# Altium PCB IMU_REV_D.PcbDoc
Units mm, origin at the board's own origin, x right, y up, seen from the top; angles counter-clockwise.
Board outline 78.62 x 35 mm, 4 copper layers (Top Layer, Mid-Layer 1, Mid-Layer 2, Bottom Layer), stack 1.08 mm thick; 25 components, 16 nets, 124 pads, 179 vias.
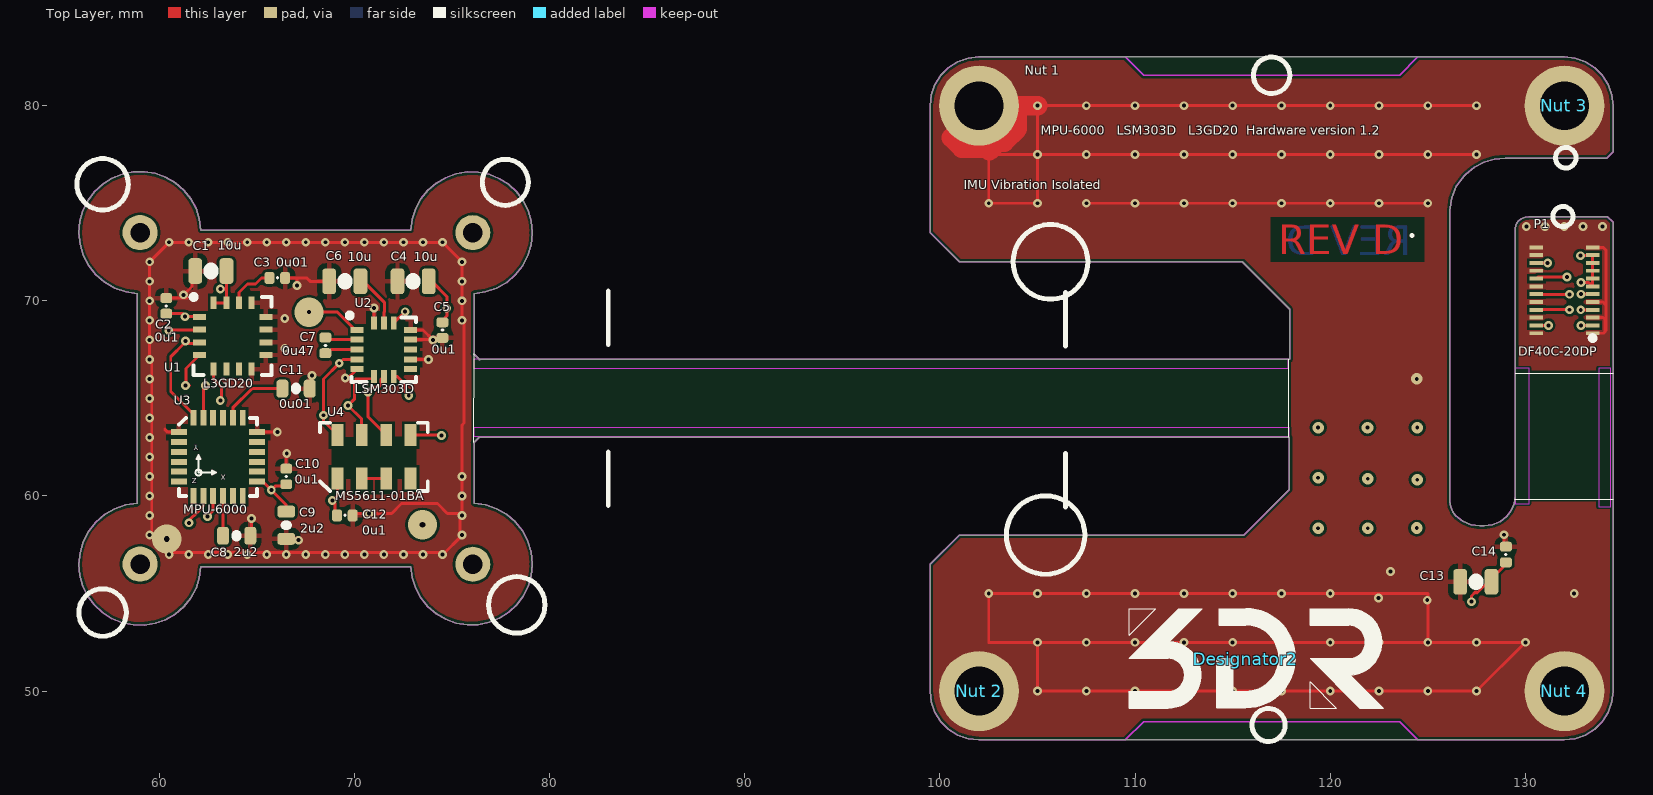
[diagram p0: Top Layer view]
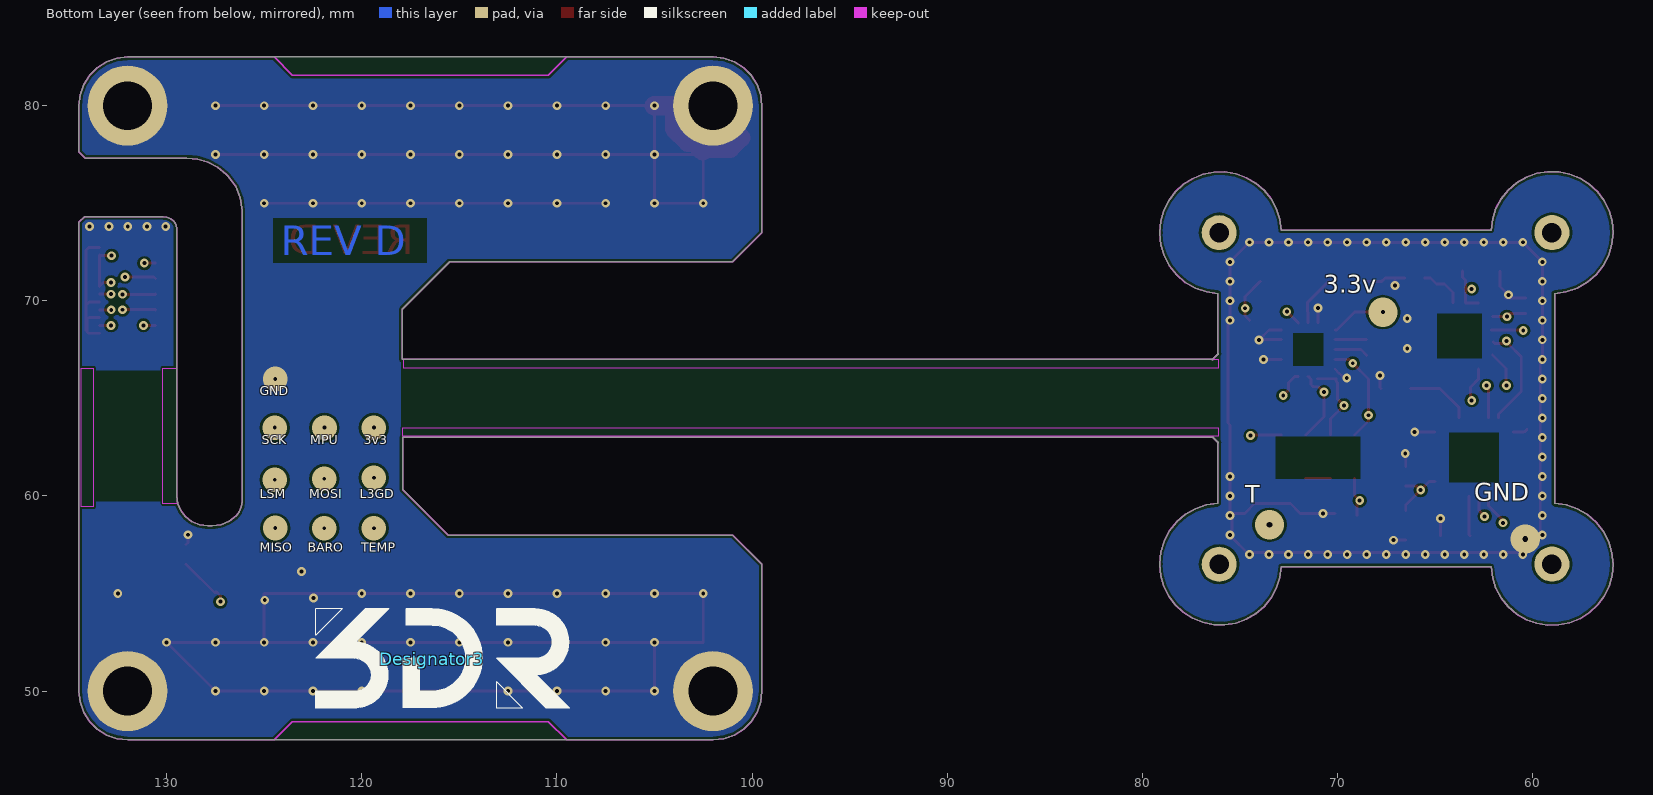
[diagram p1: Bottom Layer view, seen from below]
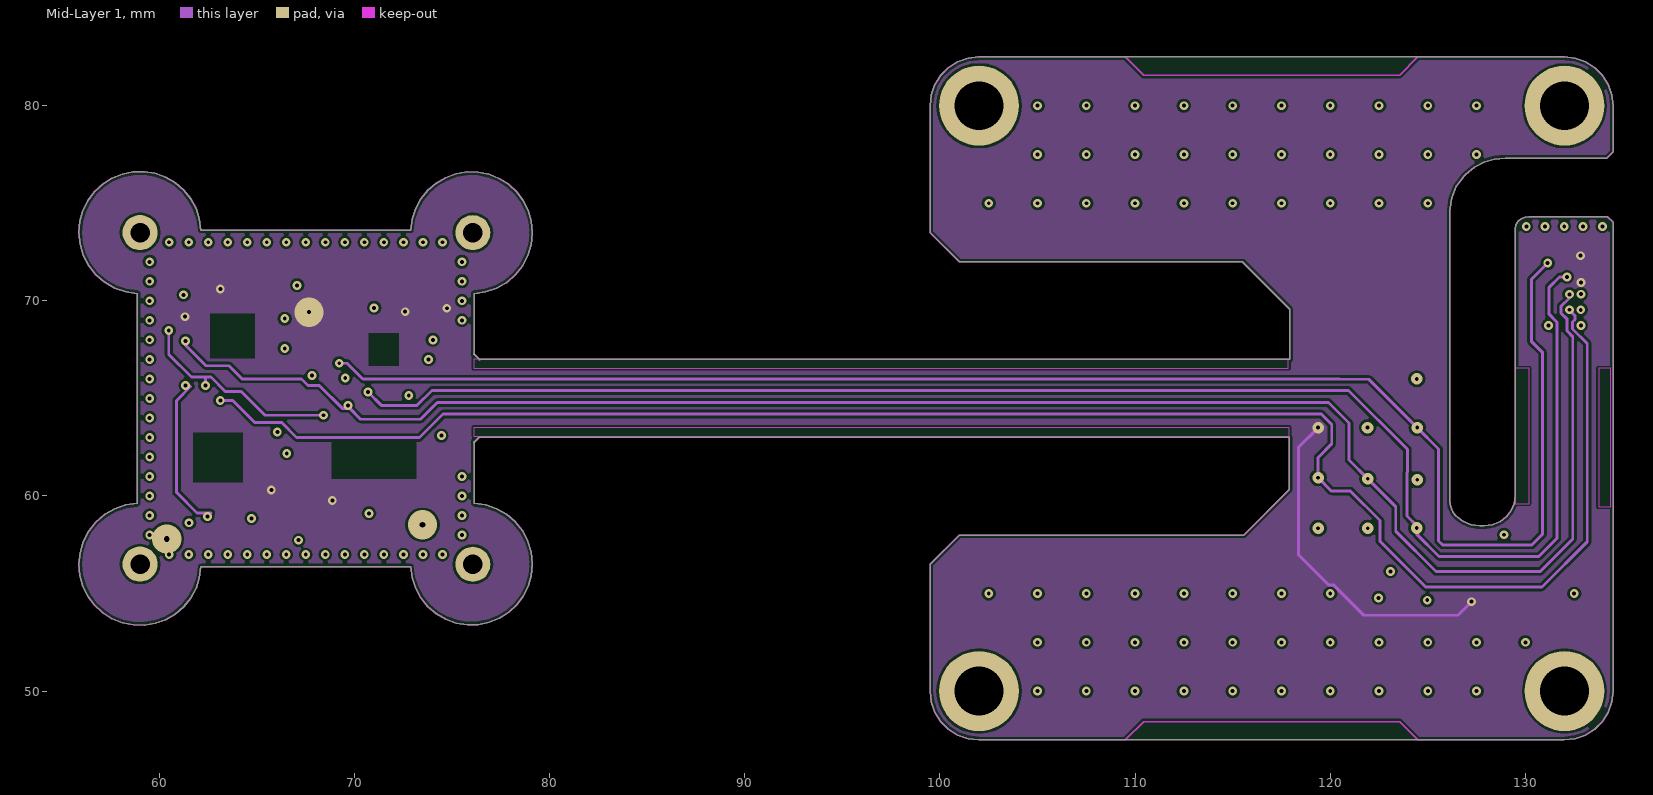
[diagram p2: Mid-Layer 1]
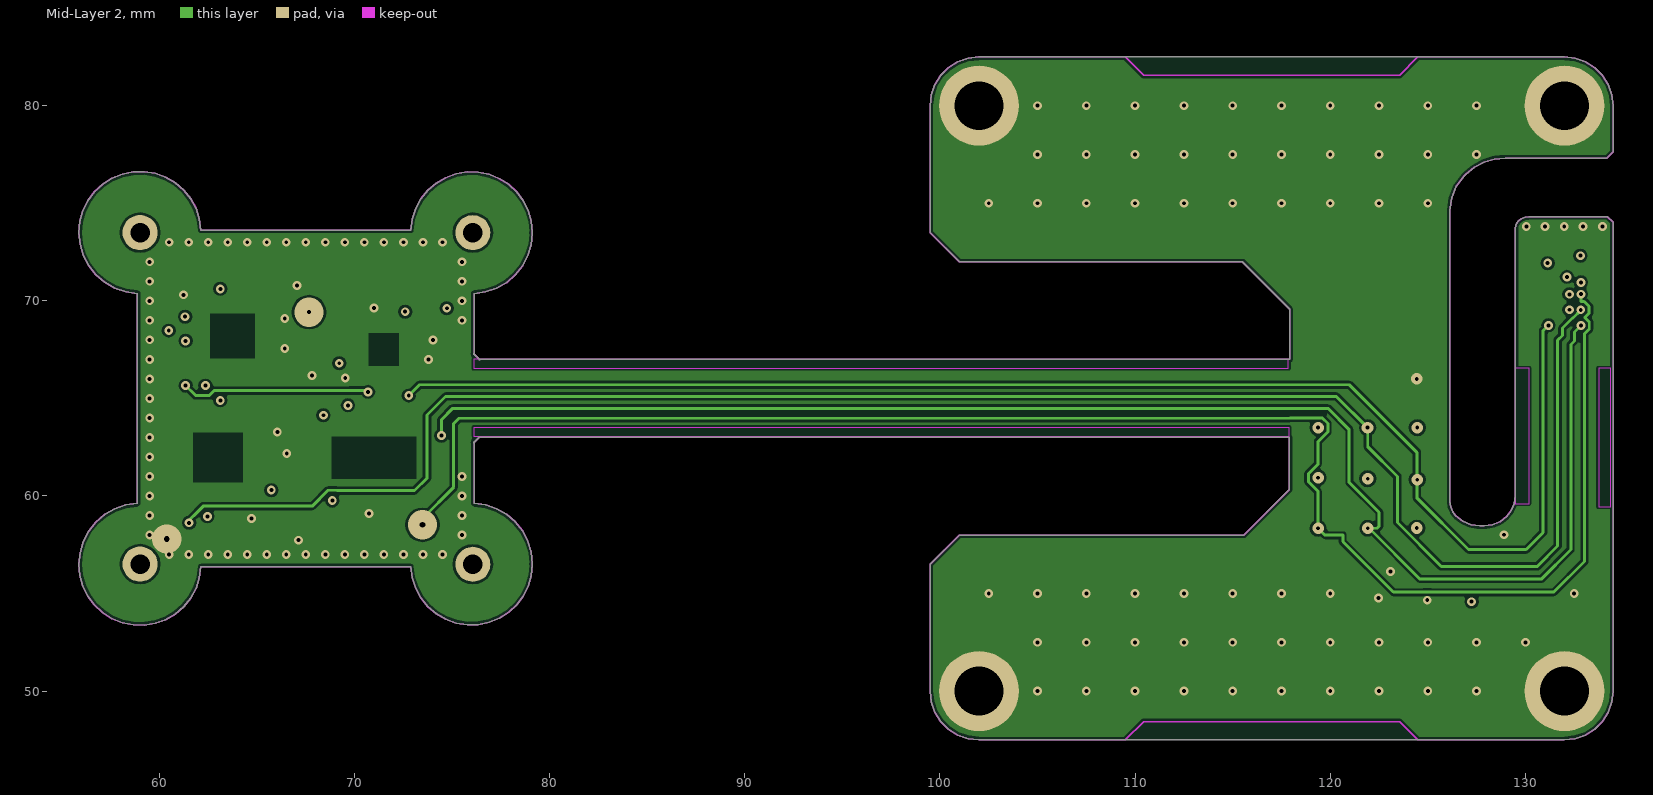
[diagram p3: Mid-Layer 2]
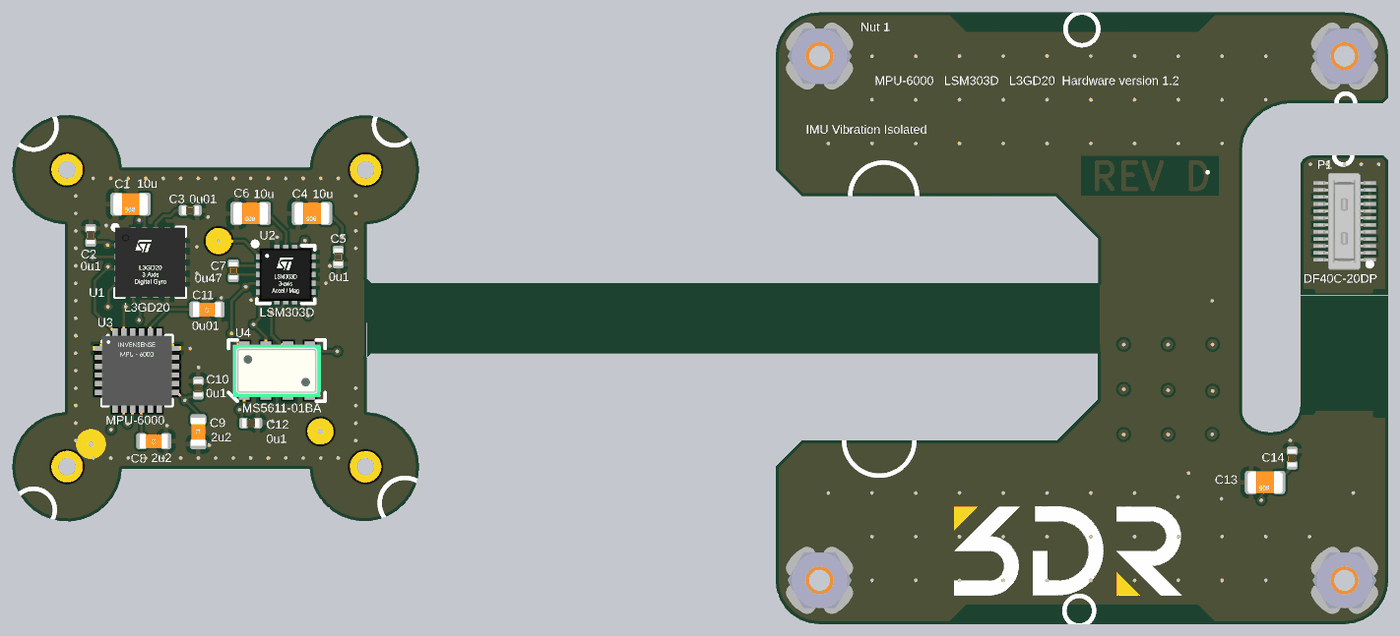
[diagram p4: 3D render of the assembled board from above, using the file's embedded part models]

## Layer stack, top to bottom
Top Solder: solder mask 0.01, BLACK Matte Finish, Dk 3.5
Top Layer: signal copper 0.0354
Dielectric 1: prepreg 0.4741, FR-4, Dk 4.2
Mid-Layer 1: signal copper 0.0177
Dielectric 2: core 0.0254, Polyamide, Dk 3
Mid-Layer 2: signal copper 0.0177
Dielectric 3: prepreg 0.4741, FR-4, Dk 4.2
Bottom Layer: signal copper 0.0354
Bottom Solder: solder mask 0.01, BLACK Matte Finish, Dk 3.5

## Board outline
58.874,59.624 58.282,59.543 57.717,59.351 57.198,59.054 56.745,58.665 56.375,58.197 56.1,57.666 55.931,57.094 55.874,56.499 55.926,55.932 56.08,55.383 56.331,54.872 56.67,54.415 57.087,54.026 57.567,53.72 58.095,53.506 58.653,53.391 59.223,53.38 59.785,53.472 60.321,53.664 60.813,53.95 61.246,54.321 61.604,54.765 61.875,55.265 62.051,55.807 62.126,56.372 72.877,56.372 72.953,55.81 73.129,55.271 73.4,54.773 73.756,54.333 74.186,53.964 74.676,53.678 75.209,53.487 75.768,53.394 76.335,53.405 76.891,53.518 77.416,53.729 77.895,54.032 78.312,54.417 78.651,54.871 78.904,55.378 79.06,55.923 79.115,56.487 79.111,56.488 79.107,56.489 79.103,56.491 79.1,56.494 79.098,56.498 79.096,56.502 79.096,56.506 79.096,56.51 79.098,56.514 79.1,56.518 79.103,56.521 79.107,56.523 79.111,56.525 79.115,56.525 79.055,57.116 78.884,57.684 78.609,58.21 78.239,58.674 77.788,59.06 77.272,59.353 76.71,59.543 76.122,59.624 76.122,62.723 76.118,62.724 76.114,62.725 76.11,62.727 76.107,62.73 76.105,62.734 76.103,62.738 76.103,62.742 76.103,62.746 76.104,62.75 76.107,62.754 76.109,62.757 76.113,62.759 76.116,62.76 76.12,62.761 76.124,62.761 76.128,62.76 76.132,62.758 76.135,62.756 76.365,62.986 76.362,62.99 76.36,62.994 76.36,62.999 76.36,63.003 76.361,63.007 76.363,63.01 76.366,63.013 76.369,63.016 76.373,63.017 76.377,63.018 76.381,63.018 76.385,63.017 76.388,63.016 76.392,63.013 76.394,63.01 76.396,63.007 76.397,63.003 76.398,62.999 117.9,62.999 117.9,60.324 115.575,57.999 100.993,57.999 99.493,56.499 99.493,49.999 99.556,49.443 99.741,48.914 100.038,48.44 100.434,48.045 100.908,47.747 101.437,47.562 101.993,47.499 131.993,47.499 132.549,47.562 133.078,47.747 133.552,48.045 133.948,48.44 134.245,48.914 134.43,49.443 134.493,49.999 134.493,74.033 134.207,74.32 130.186,74.32 129.984,74.293 129.796,74.215 129.635,74.091 129.552,73.983 129.5,73.858 129.482,73.723 129.482,59.995 129.432,59.613 129.285,59.258 129.05,58.953 128.709,58.691 128.312,58.526 127.885,58.47 127.661,58.47 127.212,58.529 126.793,58.702 126.434,58.978 126.269,59.194 126.165,59.445 126.129,59.714 126.129,74.624 126.215,75.275 126.466,75.881 126.866,76.402 126.942,76.479 127.376,76.834 127.871,77.099 128.407,77.262 128.966,77.317 134.181,77.317 134.493,77.629 134.493,79.999 134.43,80.556 134.245,81.084 133.948,81.558 133.552,81.954 133.078,82.252 132.549,82.437 131.993,82.499 101.993,82.499 101.437,82.437 100.908,82.252 100.434,81.954 100.038,81.558 99.741,81.084 99.556,80.556 99.493,79.999 99.493,73.499 100.993,71.999 115.493,71.999 117.925,69.567 117.925,66.999 76.42,66.999 76.42,66.995 76.419,66.991 76.417,66.988 76.414,66.985 76.411,66.983 76.407,66.981 76.403,66.98 76.399,66.98 76.395,66.981 76.392,66.983 76.389,66.985 76.386,66.988 76.384,66.991 76.383,66.995 76.382,66.999 76.383,67.004 76.385,67.009 76.388,67.013 76.135,67.266 76.132,67.263 76.128,67.261 76.124,67.26 76.12,67.26 76.116,67.261 76.112,67.263 76.109,67.265 76.106,67.268 76.104,67.271 76.103,67.275 76.102,67.279 76.103,67.284 76.104,67.288 76.106,67.291 76.109,67.294 76.113,67.296 76.117,67.298 76.121,67.298 76.121,70.374 76.709,70.455 77.271,70.645 77.787,70.939 78.238,71.324 78.608,71.788 78.883,72.314 79.054,72.882 79.114,73.473 79.109,73.473 79.105,73.475 79.102,73.477 79.099,73.48 79.097,73.483 79.095,73.487 79.095,73.492 79.095,73.496 79.097,73.5 79.099,73.504 79.102,73.507 79.105,73.509 79.109,73.51 79.114,73.511 79.059,74.075 78.903,74.62 78.651,75.127 78.311,75.581 77.895,75.966 77.416,76.269 76.89,76.48 76.335,76.593 75.768,76.603 75.209,76.511 74.676,76.319 74.186,76.034 73.756,75.665 73.4,75.225 73.129,74.727 72.953,74.188 72.877,73.627 62.126,73.627 62.051,74.191 61.875,74.733 61.604,75.234 61.246,75.677 60.813,76.048 60.321,76.334 59.785,76.527 59.223,76.619 58.653,76.607 58.095,76.492 57.567,76.278 57.087,75.972 56.67,75.584 56.331,75.126 56.08,74.615 55.926,74.066 55.874,73.499 55.931,72.905 56.1,72.332 56.375,71.802 56.745,71.333 57.198,70.944 57.717,70.648 58.282,70.456 58.874,70.374
board region plug_flex: 129.462,59.842 129.482,59.995 129.482,66.294 134.493,66.294 134.493,59.842
board region BASE_MOUNT: 134.493,59.842 134.493,49.999 134.43,49.443 134.245,48.914 133.948,48.44 133.552,48.045 133.078,47.747 132.549,47.562 131.993,47.499 101.993,47.499 101.437,47.562 100.908,47.747 100.434,48.045 100.038,48.44 99.741,48.914 99.556,49.443 99.493,49.999 99.493,56.499 100.993,57.999 115.575,57.999 117.9,60.324 117.9,62.999 117.874,62.999 117.861,66.999 117.925,66.999 117.925,69.567 115.493,71.999 100.993,71.999 99.493,73.499 99.493,79.999 99.556,80.556 99.741,81.084 100.038,81.558 100.434,81.954 100.908,82.252 101.437,82.437 101.993,82.499 131.993,82.499 132.549,82.437 133.078,82.252 133.552,81.954 133.948,81.558 134.245,81.084 134.43,80.556 134.493,79.999 134.493,77.629 134.181,77.317 128.966,77.317 128.407,77.262 127.871,77.099 127.376,76.834 126.942,76.479 126.866,76.402 126.466,75.881 126.215,75.275 126.129,74.624 126.129,59.714 126.165,59.445 126.269,59.194 126.434,58.978 126.793,58.702 127.212,58.529 127.661,58.47 127.885,58.47 128.312,58.526 128.709,58.691 129.05,58.953 129.285,59.258 129.432,59.613 129.462,59.842
board region FLEX: 117.874,62.999 76.398,62.999 76.392,63.013 76.377,63.018 76.363,63.01 76.36,62.994 76.135,62.756 76.12,62.761 76.111,62.756 76.116,67.261 76.132,67.263 76.388,67.013 76.382,66.999 76.389,66.985 76.403,66.98 76.417,66.988 117.861,66.999
board region IMU: 76.111,62.756 76.107,62.754 76.103,62.738 76.114,62.725 76.122,59.624 76.71,59.543 77.272,59.353 77.788,59.06 78.239,58.674 78.609,58.21 78.884,57.684 79.055,57.116 79.115,56.525 79.1,56.518 79.096,56.502 79.107,56.489 79.06,55.923 78.904,55.378 78.652,54.87 78.312,54.417 77.895,54.032 77.417,53.729 76.891,53.518 76.335,53.405 75.768,53.394 75.209,53.487 74.676,53.678 74.186,53.964 73.756,54.333 73.4,54.773 73.129,55.271 72.953,55.81 72.877,56.372 62.126,56.372 62.051,55.807 61.875,55.265 61.604,54.765 61.246,54.321 60.813,53.95 60.321,53.664 59.785,53.472 59.223,53.38 58.653,53.391 58.095,53.506 57.567,53.72 57.087,54.026 56.67,54.415 56.331,54.872 56.08,55.383 55.926,55.932 55.874,56.499 55.931,57.094 56.1,57.666 56.375,58.197 56.745,58.665 57.198,59.054 57.717,59.351 58.282,59.543 58.874,59.624 58.874,70.374 58.282,70.456 57.717,70.648 57.198,70.944 56.745,71.333 56.375,71.802 56.1,72.332 55.931,72.905 55.874,73.499 55.926,74.066 56.08,74.615 56.331,75.126 56.67,75.584 57.087,75.972 57.567,76.278 58.095,76.492 58.653,76.607 59.223,76.619 59.785,76.527 60.321,76.334 60.813,76.048 61.246,75.677 61.604,75.234 61.875,74.733 62.051,74.191 62.126,73.627 72.877,73.627 72.953,74.188 73.129,74.727 73.4,75.225 73.756,75.665 74.186,76.034 74.676,76.319 75.209,76.511 75.768,76.603 76.335,76.593 76.89,76.48 77.416,76.269 77.895,75.966 78.311,75.581 78.651,75.127 78.903,74.62 79.059,74.075 79.114,73.511 79.099,73.504 79.095,73.487 79.105,73.475 79.054,72.882 78.883,72.314 78.608,71.788 78.238,71.324 77.787,70.939 77.271,70.645 76.709,70.455 76.121,70.374 76.121,67.298 76.106,67.291 76.103,67.275 76.116,67.261
board region PLUG_MOUNT: 129.482,66.294 129.482,73.723 129.5,73.858 129.552,73.983 129.635,74.091 129.796,74.215 129.984,74.293 130.186,74.32 134.207,74.32 134.493,74.033 134.493,66.294

## Design rules (kind name [scope] priority, off if disabled: settings)
Clearance [All] p1: gap=0.127
ComponentClearance ComponentClearance_1 [HasFootprint('3DR-WORDMARK-LARGE')] p1: gap=0 collisioncheckmode=3 verticalgap=0 showdistances=FALSE
ComponentClearance ComponentClearance_2 [(HasFootprint('BASE FOAM')) vs HasFootprint('DF13A-10P-1.25H')] p2: gap=0 collisioncheckmode=3 verticalgap=0 showdistances=FALSE
ComponentClearance ComponentClearance_3 [HasFootprint('PEM-SMTSO-M1.6-2-ET')] p3: gap=0 collisioncheckmode=3 verticalgap=0 showdistances=FALSE
ComponentClearance ComponentClearance_4 [(HasFootprint('DF40C-10-DP') OR HasFootprint('DF13A-10P-1.25H'))] p4: gap=0 collisioncheckmode=3 verticalgap=0 showdistances=FALSE
ComponentClearance ComponentClearance_5 [(HasFootprint('0402-CAP') OR HasFootprint('0603-CAP') OR HasFootprint('0805-CAP') OR HasFootprint('MS5611-01BA'))] p5: gap=0 collisioncheckmode=3 verticalgap=0 showdistances=FALSE
ComponentClearance [All] p6: gap=0.125 collisioncheckmode=3 verticalgap=0.254 showdistances=FALSE
MinimumSolderMaskSliver [All] p1 off: minsoldermaskwidth=0.254
NetAntennae exceptions [IsVia] p1: netantennaetolerance=100
NetAntennae [All] p2: netantennaetolerance=0
PlaneConnect NutConnect [HasFootprint('PEM-SMTSO-M1.6-2-ET')] p1: planeconnectstyle=Direct reliefexpansion=0.508 reliefentries=4 reliefconductorwidth=0.254 reliefairgap=0.254
PlaneConnect [All] p2: planeconnectstyle=Relief reliefexpansion=0.508 reliefentries=4 reliefconductorwidth=0.254 reliefairgap=0.254
PolygonConnect [IsVia] p1: connectstyle=Direct reliefconductorwidth=0.254 reliefentries=4 polygonreliefangle="90 Angle" airgapwidth=0.254
PolygonConnect PolygonConnect_2 [HasFootprint('PEM-SMTSO-M1.6-2-ET')] p2: connectstyle=Direct reliefconductorwidth=0.254 reliefentries=4 polygonreliefangle="90 Angle" airgapwidth=0.254
PolygonConnect "P1_direct GND" [(InComponent('P1') AND InNet('GND'))] p3: connectstyle=Direct reliefconductorwidth=0.254 reliefentries=4 polygonreliefangle="90 Angle" airgapwidth=0.254
PolygonConnect PolygonConnect_1 [All] p4: connectstyle=Relief reliefconductorwidth=0.254 reliefentries=4 polygonreliefangle="90 Angle" airgapwidth=0.254
RoutingVias [All] p1: holewidth=0.2 width=0.45 viastyle="Through Hole" minholewidth=0.2 minwidth=0.45 maxholewidth=0.711 maxwidth=1.27
SilkToBoardRegionClearance [All] p1 off:
SilkToSilkClearance [All] p1 off: silktosilkclearance=0.254
SilkToSolderMaskClearance [IsPad] p1 off: minsilkscreentomaskgap=0.254 clearancetoexposedcopper=TRUE
SolderMaskExpansion [All] p1: expansion=0.102
Width [All] p1: maxlimit=3 minlimit=0.12 preferedwidth=0.15
23 further rules are at their usual default settings.

## Components (designator, comment, footprint, x,y, rotation, side; value= is the part's Value field where it differs from the comment)
C1 "10u" 0805-CAP 62.636,71.526 r180 top
C2 "0u1" 0402-CAP 60.35,69.742 r90 top
C3 "0u01" 0402-CAP 66.04,71.171 r0 top
C4 "10u" 0805-CAP 73,71 r180 top
C5 "0u1" 0402-CAP 74.5,68.5 r270 top
C6 "10u" 0805-CAP 69.5,71 r180 top
C7 "0u47" 0402-CAP 68.504,67.716 r270 top
C8 "2u2" 0603-CAP 63.957,57.963 r0 top
C9 "2u2" 0603-CAP 66.5,58.5 r270 top
C10 "0u1" 0402-CAP 66.5,61 r90 top
C11 "0u01" 0603-CAP 67,65.5 r0 top
C12 "0u1" 0402-CAP 69.5,59 r0 top
C13 "10u" 0805-CAP 127.46,55.601 r180 top
C14 "0u1" 0402-CAP 129,57 r90 top
Designator2 "Comment" 3DR_SMALL 115.672,51.664 r0 top (schematic designator logo1)
Designator3 "Comment" 3DR_SMALL 116.383,51.664 r180 bottom (schematic designator logo2)
"Nut 1" "PEM-SMTSO-M1.6-2-ET" PEM-SMTSO-M1.6-2-ET 102,80 r90 top
"Nut 2" "PEM-SMTSO-M1.6-2-ET" PEM-SMTSO-M1.6-2-ET 102,50 r90 top
"Nut 3" "PEM-SMTSO-M1.6-2-ET" PEM-SMTSO-M1.6-2-ET 132,80 r90 top
"Nut 4" "PEM-SMTSO-M1.6-2-ET" PEM-SMTSO-M1.6-2-ET 132,50 r90 top
P1 "DF40C-20DP" DF40C-20-DP 132,70.54 r180 top locked
U1 "L3GD20" L3GD20 63.754,68.199 r0 top
U2 "LSM303D" LSM303D 71.5,67.5 r0 top
U3 "MPU-6000" QFN-24 63,62 r0 top
U4 "MS5611-01BA" MS5611-01BA 71,62 r90 top

## Footprints (in the part's own frame and the unit in brackets; to place one, negate y for a bottom-side part, rotate by r counter-clockwise, add the part's x,y. Pads: shape width x height; smd on the part's side, far side on the other; paste and mask are expansions set on the pad)
3DR_SMALL [mm]
  silkscreen extent -5.97,-2.53 7.04,2.57
0402-CAP [mil]
  rrect50% 20x24 smd mask+0: P$1(-15.75,0) P$2(15.75,0)
  silkscreen extent 0,0 0,1, body extent -20,-10 20,10, height 20
0603-CAP [mil] "0603-CAP"
  rrect50% 24x36 smd mask+0: P$1(-27.56,0) P$2(27.56,0)
  silkscreen extent 0,-2 0,2, body extent -31,-16 31,16, height 34
0805-CAP [mil]
  rrect50% 28x52 smd mask+0: P$1(-31.5,0) P$2(31.5,0)
  silkscreen extent 0,-2 0,2, body extent -39,-25 39,25, height 31
DF40C-20-DP [mm]
  rect 0.7x0.2 smd mask+0: 1(-1.444,1.8) 2(1.436,1.8) 3(-1.444,1.4) 4(1.436,1.4) 5(-1.444,1) 6(1.436,1) 7(-1.444,0.6) 8(1.436,0.6) 9(-1.444,0.2) 10(1.436,0.2) 11(-1.444,-0.2) 12(1.436,-0.2) 13(-1.444,-0.6) 14(1.436,-0.6) 15(-1.444,-1) 16(1.436,-1) 17(-1.444,-1.4) 18(1.436,-1.4) 19(-1.444,-1.8) 20(1.436,-1.8) 21(-1.444,-2.2) 22(1.436,-2.2) 23(-1.444,2.2) 24(1.436,2.2)
  silkscreen extent -1.57,2.33 -1.32,2.57, body extent -1.47,-2.76 1.5,2.76, height 1.09
L3GD20 [mm] "4x4x1"
  rect 0.66x0.305 smd mask+0: 1(-1.7,0.975) 2(-1.7,0.325) 3(-1.7,-0.325) 4(-1.7,-0.975) 9(1.7,-0.975) 10(1.7,-0.325) 11(1.7,0.325) 12(1.7,0.975)
  rect 0.305x0.66 smd mask+0: 5(-0.975,-1.7) 6(-0.325,-1.7) 7(0.325,-1.7) 8(0.975,-1.7) 13(0.975,1.7) 14(0.325,1.7) 15(-0.325,1.7) 16(-0.975,1.7)
  silkscreen extent -2.13,-2 2,2.13, body extent -2,-2 2,2, height 0.98
LSM303D [mil] "LGA-16L"
  rect 26x12 smd mask+0: 1(-53.94,40) 2(-53.94,20) 3(-53.94,0) 4(-53.94,-19.69) 5(-53.94,-39.37) 9(54,-39.37) 10(54,-19.69) 11(54,0) 12(54,20) 13(54,40)
  rect 12x26 smd mask+0: 6(-19.68,-53.94) 7(0,-53.94) 8(20,-53.94) 14(20,54) 15(0,54) 16(-19.68,54)
  silkscreen extent -74,-65 65,74, body extent -59,-59 59,59
MS5611-01BA [mil] "MS5611-01BA"
  rect 44x24 smd: 1(-43.31,74) 2(-43.31,25) 3(-43.31,-24.61) 4(-43.31,-73.82) 5(44,-73.82) 6(44,-24.61) 7(44,25) 8(44,74)
  silkscreen extent -69,-108 69,109, body extent -59,-98 59,99, height 39
PEM-SMTSO-M1.6-2-ET [mm] "Surface mount thread"
  round 4.1 hole 2.5 paste-2 mask-2: 0(0,0)
  body extent -1.59,-1.83 1.59,1.83, height 2
QFN-24 [mil] "QFN-24"
  rect 32x12 smd: 1(-78.74,50) 2(-78.74,30) 3(-78.74,10) 4(-78.74,-9.84) 5(-78.74,-29.53) 6(-78.74,-49.21) 13(79,-49.21) 14(79,-29.53) 15(79,-9.84) 16(79,10) 17(79,30) 18(79,50)
  rect 12x32 smd: 7(-49.21,-78.74) 8(-29.53,-78.74) 9(-9.84,-78.74) 10(10,-78.74) 11(30,-78.74) 12(50,-78.74) 19(50,79) 20(30,79) 21(10,79) 22(-9.84,79) 23(-29.53,79) 24(-49.21,79)
  silkscreen extent -79,-79 79,79, body extent -79,-79 79,79, height 35

## Part data
C1 C4 C6 C13: library part CAPACITOR-0805, "Capacitor, 10uF, 10V, Y5V, 0805, Ceramic"
C2 C5 C10 C12 C14: library part CAPACITOR-0402, "Capacitor, 0.1uF, 16V, Y5V, 0402, Ceramic"
C3: library part CAPACITOR-0402, "Capacitor, 10000pF, 16V, 10%, X7R, 0402, Ceramic"
C7: library part CAPACITOR-0402, "Capacitor,  0.47uF, 16V, 10%, X5R, 0402, Ceramic"
C8 C9: library part CAPACITOR-0603, "Capacitor, 2.2uF, 16V, 10%, X6S, 0603, Ceramic"
C11: library part CAPACITOR-0603, "Capacitor, 10000pF, 25V, 5%, X7R, 0603, Ceramic"
Designator2 Designator3: library part "3DR-Logo Large"
"Nut 1" "Nut 2" "Nut 3" "Nut 4": "Fastener, M1.6x2mm, SMTSO, Carbon Steel"
P1: "Connector, HDR, 20Pos, 0.4mm, SMD, GOLD"
U1: "Sensor, Low-power, Three-axis, Angular rate"
U2: "Module, 3D Accelerometer, 3D Magnetometer"
U3: "3 Axis Accel, 3Axis Gyro"
U4: "Board, Digital pressure sensor I2C/SPI"

## Free pads (board coordinates)
  round 1.8 hole 1: 0(59.004,56.507) 1(76.06,56.5) 2(76.06,73.493) 3(59.004,73.5)

## Via types
v1: diameter 0.45, hole 0.2, Top Layer to Bottom Layer, tented both sides, 166 vias
v2: diameter 0.6/0.6/0.6/1.27 (per signal layer), hole 0.2, Top Layer to Bottom Layer, tented top, 10 vias
v3: diameter 1.5, hole 0.3, Top Layer to Bottom Layer, tented bottom, 2 vias
v4: diameter 1.5, hole 0.2, Top Layer to Bottom Layer, tented bottom, 1 vias

## Nets (pads, with @x,y where several pads share a name; then routed paths per layer and width w, separated by ;. In a path a pad name is that pad's centre, name@x,y a point inside that pad or via, vN(x,y) a via of type N, cw(c..) or ccw(c..) an arc to the next point about the centre after c; other vN are vias at no path point)
+3V3: C1.P$1 C2.P$1 C4.P$1 C5.P$1 C9.P$1 C10.P$1 C12.P$1 C13.P$1 C14.P$1 P1.11 P1.13 P1.15 P1.17 P1.19 U1.1 U1.15 U1.16 U2.1 U2.14 U3.13 U4.1 | length 38.8
  Top Layer w0.15: C2.P$1 61.214,69.342 61.366,69.19 U1.1@62.054,69.19 ; U1.16@62.763,69.899 U1.16 U1.15 63.429,70.612 ; v1(63.119,70.612) 63.429,70.612 ; C1.P$1@63.586,71.526 63.586,71.206 63.429,71.049 63.429,70.612 ; U3.13 65.285,60.75 v1(65.735,60.3) ; C9.P$1@66.5,59.25 66.5,59.535 v1(65.735,60.3) ; C10.P$1@66.5,60.5 65.936,60.5 v1(65.735,60.3) ; v4(67.666,69.418) 69.126,69.418 70.028,68.516 U2.1 ; C12.P$1@69,59 69,59.626 v1(68.859,59.766) 69.12,60.027 U4.1 ; U2.14 72.58,69.444 v1(72.593,69.444) ; C4.P$1@73.95,71 74.727,70.223 v1(74.727,69.621) 74.727,69.227 C5.P$1@74.5,69 ; v1(127.244,54.583) 127.244,54.879 127.457,55.093 127.525,55.025 C14.P$1@129,56.5 ; v1@132.791,72.288 v1(132.817,72.314) 133.418,72.314 P1.19 P1.17 P1.15 P1.13 P1.11 133.242,70.942 v1(132.846,70.942)
  Mid-Layer 1 w0.15: v2(119.38,63.5) 118.364,62.484 118.364,57 119.937,55.427 120.177,55.427 121.715,53.889 126.549,53.889 v1(127.244,54.583)
  other v1: 61.316,69.19
A\C\C\E\L\_\M\A\G\_\C\S\: P1.2 U2.8 | length 76.3
  Top Layer w0.15: U2.8 72.173,66.13 72.517,65.786 72.517,65.405 v1(72.774,65.148) ; P1.2 v1(131.183,68.74)
  Mid-Layer 2 w0.15: v1(72.774,65.148) 73.327,65.7 120.97,65.7 124.435,62.236 124.435,61 124.435,59.907 127.09,57.252 130.04,57.252 130.909,58.12 130.909,68.465 v1(131.183,68.74)
  other v2: 124.46,60.833
B\A\R\O\_\C\S\: P1.1 U4.5 | length 80.2
  Top Layer w0.15: U4.5 v1@74.447,63.118 ; v1(132.846,68.74) P1.1
  Mid-Layer 2 w0.15: v1(74.447,63.094) 74.447,63.906 75.032,64.491 119.878,64.491 120.97,63.399 120.97,60.692 122.5,59.163 122.5,58.444 122.401,58.345 v2(121.92,58.345) ; v2@121.957,58.383 124.606,55.734 130.817,55.734 132.334,57.252 132.334,67.767 132.512,67.945 132.512,68.405 v1(132.846,68.74)
G\Y\R\O\_\C\S\: P1.6 U1.5 | length 95
  Top Layer w0.15: U1.5 62.779,65.979 63.17,65.589 v1@63.17,64.897 ; P1.6 130.569,69.545 v1(132.258,69.545)
  Mid-Layer 1 w0.15: v1(63.119,64.897) 63.754,64.897 64.878,63.773 66.248,63.773 67.029,62.992 73.33,62.992 74.538,64.2 118.934,64.2 119.541,64.2 120.075,63.667 120.075,62.671 119.38,61.976 v2(119.38,60.935) 120.068,60.246 121.042,60.246 122.549,58.739 122.549,57.675 124.893,55.332 130.846,55.332 133.168,57.654 133.168,67.814 132.419,68.563 132.419,68.917 132.537,69.035 132.537,69.236 132.41,69.363 132.41,69.393 v1(132.258,69.545)
GND: "Nut 1.0" "Nut 2.0" "Nut 3.0" "Nut 4.0" C1.P$2 C2.P$2 C3.P$2 C4.P$2 C5.P$2 C6.P$2 C8.P$2 C9.P$2 C10.P$2 C11.P$2 C12.P$2 C13.P$2 C14.P$2 P1.3 P1.4 P1.7 P1.8 P1.12 P1.16 P1.20 P1.21 P1.22 P1.23 P1.24 U1.8 U1.9 U1.10 U1.11 U1.12 U1.13 U2.5 U2.10 U2.12 U2.13 U2.16 U3.1 U3.18 U4.2 U4.3 | length 258.7
  Top Layer w0.15: 60.274,63.424 60.428,63.27 U3.1 ; C2.P$2 61.405,70.142 v1(61.239,70.307) 61.671,70.739 C1.P$2@61.671,71.526 ; C8.P$2@64.719,57.963 v1(64.719,58.852) ; U3.18 66.039,63.27 v1(66.04,63.271) ; C9.P$2@66.5,57.738 67.128,57.738 v1(67.132,57.734) ; C10.P$2@66.5,61.508 66.5,62.157 v1(66.523,62.179) ; C3.P$2@66.548,71.171 67.05,71.171 ; v1(67.056,70.79) 67.056,71.165 67.05,71.171 ; C11.P$2@67.762,65.5 67.818,65.556 v1(67.818,66.167) ; C6.P$2@68.535,71 67.723,71 67.553,71.171 67.05,71.171 ; v1@69.571,66.091 69.748,66.091 ; v1@69.727,66.097 69.727,66.121 69.889,66.283 69.913,66.283 U2.5 ; C12.P$2@70.114,59.106 v1(70.739,59.106) 71.903,59.106 72.411,59.614 74.244,59.614 74.752,59.106 75.394,59.106 75.394,57.862 74.638,57.106 60.395,57.106 59.606,57.895 59.606,66.894 v1(59.5,67) v1(59.5,68) v1(59.5,69) v1(59.5,70) v1(59.5,71) v1(59.5,72) v1(60.5,73) v1(61.5,73) v1(62.5,73) v1(63.5,73) v1(64.5,73) v1(65.5,73) v1(66.5,73) v1(67.5,73) v1(68.5,73) v1(69.5,73) v1(70.5,73) v1(71.5,73) v1(72.5,73) v1(73.5,73) v1(74.5,73) v1(75.5,72) v1(75.5,71) v1(75.5,70) v1(75.5,69) 75.607,68.893 75.607,63.734 75.5,63.627 v1(75.5,61) v1(75.5,60) v1(75.5,59) ; U4.2 U4.3 ; U2.16 v1(71,69.64) ; U2.10 v1(73.792,67) ; U2.12 74.003,68.008 73.508,68.504 72.884,68.504 U2.13 ; 103.963,79.62 104.343,80 ; v1(107.5,75) v1(110,75) v1(112.5,75) v1(115,75) v1(117.5,75) v1(120,75) v1(122.5,75) v1(125,75) ; v1(127.5,77.5) v1(105,77.5) ; v1(127.5,80) v1(125,80) v1(122.5,80) v1(120,80) v1(117.5,80) v1(115,80) v1(112.5,80) v1(110,80) v1(107.5,80) v1(105,80) v1(105,77.5) ; v1(128.905,58.014) 128.905,57.603 C14.P$2@129,57.508 ; P1.23 133.999,68.34 134.087,68.428 134.087,69.037 133.984,69.14 P1.3 ; P1.7 133.971,69.94 134.087,69.825 ; P1.21 133.991,72.74 134.137,72.593 134.137,68.478 ; v1(105,52.5) v1(125,52.5) ; v1(105,52.5) v1(105,50) v1(127.5,50) v1(130,52.5) v1(125,52.5) ; v1(105,52.5) 102.5,52.5 v1(102.5,55) 125,55 v1(125,52.5) ; v1(105,77.5) 102.5,77.5 v1(102.5,75) v1(105,75) v1(105,77.5)
  Top Layer w1: 100.584,78.359 101.124,77.819 102.398,77.819 102.532,77.685 102.976,78.128 103.282,78.128 103.963,78.809 103.963,79.62 ; 102,80 104.343,80 v1(105,80)
  Mid-Layer 1 w0.15: v1@67.056,70.7 v1(67.056,70.79) ; v1(67.132,57.734) v1@67.136,57.738
  other v1: 107.5,50 110,50 112.5,50 115,50 117.5,50 120,50 122.5,50 125,50 107.5,52.5 110,52.5 112.5,52.5 115,52.5 117.5,52.5 120,52.5 122.5,52.5 127.5,52.5 124.968,54.661 122.477,54.777 105,55 107.5,55 110,55 112.5,55 115,55 117.5,55 120,55 132.5,55 123.087,56.134 60.5,57 61.5,57 62.5,57 63.5,57 64.5,57 65.5,57 66.5,57 67.5,57 68.5,57 69.5,57 70.5,57 71.5,57 72.5,57 73.5,57 74.5,57 59.5,58 75.5,58 59.5,59 59.5,60 59.5,61 59.5,62 59.5,63 59.5,64 59.5,65 59.5,66 69.52,66.04 66.421,67.564 74.016,67.996 66.421,69.088 130.048,73.814 131.003,73.814 131.991,73.814 132.954,73.814 133.948,73.814 107.5,77.5 110,77.5 112.5,77.5 115,77.5 117.5,77.5 120,77.5 122.5,77.5 125,77.5
  other v2: 124.435,66
  other v3: 60.373,57.8
IMU_MISO: P1.14 U1.4 U2.7 U3.9 U4.6 | length 109.7
  Top Layer w0.15: v1(61.341,65.659) 61.544,65.659 61.366,65.837 61.366,66.536 U1.4 ; v1(62.459,58.953) 62.75,59.245 U3.9 ; v1(70.688,65.329) v1@70.699,65.329 ; U4.6 70.688,64.054 70.688,65.318 v1@70.699,65.329 ; P1.14 130.645,71.222 v1(132.131,71.222) ; v1@70.699,65.329 70.968,65.598 ; v1@70.699,65.329 70.968,65.598 ; 70.968,65.598 71.236,65.598 ; 70.968,65.598 71.236,65.598 ; 71.236,65.598 71.354,65.716 U2.7@71.354,65.984 ; U2.7@71.354,65.984 U2.7 U2.7@71.354,65.984
  Mid-Layer 1 w0.15: v1(61.341,65.659) 61.544,65.659 61.595,65.608 60.884,64.897 60.884,60.173 61.925,59.131 62.636,59.131 v1(62.459,58.953) ; v1(70.688,65.329) 71.371,64.646 73.206,64.646 73.965,65.405 120.936,65.405 123.952,62.389 123.952,61.227 123.933,61.208 123.933,58.974 124.435,58.472 124.435,58.039 125.578,56.896 130.683,56.896 131.61,57.823 131.61,68.917 131.532,68.996 131.219,69.308 131.219,70.693 131.748,71.222 v1(132.131,71.222)
  Mid-Layer 2 w0.15: v1(61.341,65.659) 61.843,65.157 62.565,65.157 62.807,65.399 69.73,65.399 69.736,65.405 v1@70.612,65.405 ; v1(70.688,65.329) v1@70.612,65.405 ; v1@70.688,65.405 v1@70.612,65.405
  other v2: 124.435,58.354
IMU_MOSI: P1.10 U1.3 U2.6 U3.24 U4.7 | length 103.7
  Top Layer w0.15: U3.24 61.75,64.183 60.579,65.354 60.579,67.132 61.265,67.818 61.948,67.818 U1.3@62.029,67.899 ; U4.7 70.365,63.939 v1(69.662,64.641) 70.004,64.983 70.004,65.814 70.073,65.883 70.073,66.006 U2.6@71.027,66.006 ; P1.10 130.571,70.333 v1(132.258,70.333)
  Mid-Layer 1 w0.15: v1(61.341,67.945) 61.341,67.793 61.303,67.754 62.382,66.675 63.572,66.675 64.245,66.001 67.274,66.001 67.61,65.665 68.193,65.665 69.367,64.491 69.748,64.491 70.307,63.932 73.381,63.932 74.239,64.79 119.911,64.79 120.965,63.737 120.965,61.839 v2(121.92,60.884) 123.357,59.446 123.357,58.195 125.418,56.134 130.759,56.134 132.427,57.802 132.427,68.164 132.142,68.448 132.142,69.057 131.831,69.368 131.831,69.722 132.258,70.149 v1(132.258,70.333)
IMU_SCK: P1.18 U1.2 U2.4 U3.23 U4.8 | length 103.1
  Top Layer w0.15: v1@60.477,68.508 U1.2@62.13,68.508 ; U3.23 62.25,65.552 v1(62.357,65.659) ; U4.8 68.402,63.836 68.402,65.989 v1(69.215,66.802) 69.413,67 U2.4 ; P1.18 131.133,71.94 v1(131.14,71.933)
  Mid-Layer 1 w0.15: v1(60.477,68.478) 60.477,67.253 61.64,66.091 62.357,66.091 ; v1(62.357,65.659) 62.357,66.091 ; v1(68.402,64.135) 65.405,64.135 64.188,65.352 63.374,65.352 62.635,66.091 62.357,66.091 ; v1(69.215,66.802) 69.621,66.802 69.616,66.797 70.424,65.989 120.472,65.989 120.478,65.983 121.977,65.983 v2(124.46,63.5) 125.552,62.408 125.552,57.69 125.747,57.495 130.338,57.495 130.886,58.044 130.886,67.34 130.302,67.924 130.302,71.095 v1(131.14,71.933)
IMU_TEMPERATURE_CONTROL: P1.9 | length 87.6
  Top Layer w0.15: v1(132.846,70.34) P1.9
  Mid-Layer 2 w0.15: v3(73.482,58.522) 73.482,58.852 75.08,60.45 75.08,60.816 75.073,60.823 75.073,63.706 75.349,63.981 117.925,63.981 117.946,64.002 119.588,64.002 119.882,63.708 119.882,63.292 119.38,62.79 119.38,61.645 118.878,61.143 118.878,60.727 119.38,60.225 v2(119.38,58.345) 119.733,57.992 120.65,57.992 120.65,57.658 123.233,55.075 124.779,55.075 124.791,55.088 125.145,55.088 125.157,55.075 131.453,55.075 133.023,56.645 133.023,68.313 133.273,68.563 133.273,68.917 133.045,69.145 133.264,69.363 133.264,69.717 133.014,69.967 132.846,69.967 v1(132.846,70.34)
M\P\U\_\C\S\: P1.5 U3.8 | length 95.6
  Top Layer w0.15: v1@61.519,58.75 61.934,59.165 61.934,59.171 62.25,59.487 U3.8 ; v1(132.837,69.54) P1.5
  Mid-Layer 2 w0.15: v1(61.519,58.623) 61.519,58.75 61.934,59.165 61.934,59.171 62.241,59.478 67.829,59.478 68.642,60.291 69.077,60.291 69.094,60.274 73.076,60.274 73.711,60.909 73.711,64.147 74.664,65.1 120.311,65.1 121.92,63.491 121.92,62.525 123.444,61.001 123.444,58.635 125.691,56.388 130.607,56.388 131.648,57.429 131.648,67.977 131.899,68.228 131.899,68.602 132.415,69.118 132.435,69.118 132.837,69.52 v1(132.837,69.54)
  other v2: 121.911,63.5
NetC3_P$1: C3.P$1 U1.14 | length 2.3
  Top Layer w0.15: U1.14 64.079,70.429 64.516,70.866 64.922,70.866 65.227,71.171 C3.P$1@65.54,71.171
NetC6_P$1: C6.P$1 U2.15 | length 2.6
  Top Layer w0.15: C6.P$1@70.45,71 71.525,69.925 71.525,69.422 71.5,69.397 U2.15
NetC7_P$1: C7.P$1 U2.2 | length 1.6
  Top Layer w0.15: C7.P$1@68.504,68.021 68.517,68.021 68.53,68.008 U2.2
NetC7_P$2: C7.P$2 U2.3 | length 1.7
  Top Layer w0.15: C7.P$2@68.504,67.208 68.795,67.5 U2.3
NetC8_P$1: C8.P$1 U3.10 | length 2.1
  Top Layer w0.15: C8.P$1@63.207,57.963 63.254,58.01 U3.10
NetC11_P$1: C11.P$1 U3.20 | length 3.4
  Top Layer w0.15: U3.20 63.762,64.524 64.738,65.5 C11.P$1@66.25,65.5
pads on no net: U1.6 U1.7 U2.9 U2.11 U3.2 U3.3 U3.4 U3.5 U3.6 U3.7 U3.11 U3.12 U3.14 U3.15 U3.16 U3.17 U3.19 U3.21 U3.22 U4.4

## Polygon pours and split planes (outlines as drawn)
GND on Mid-Layer 2 "MID GND" (solid, remove dead copper, pour order 14): 45.835,92.957 144.035,92.957 145.735,91.257 145.735,41.657 43.735,41.657 42.535,40.457 46.435,44.357 46.435,92.657
+3V3 on Mid-Layer 1 "MID 3v3" (solid, remove dead copper, pour order 13): 57.708,87.518 58.508,86.718 143.108,86.718 143.108,44.818 138.908,40.618 137.508,42.018 47.208,42.018 47.208,78.318 55.908,87.018
GND on Bottom Layer "Bottom GND" (solid, remove dead copper, pour order 11): 51.25,88.128 139,88.128 139.5,87.628 140.75,86.378 140.75,43.128 48.25,43.128 45.75,45.628 51.5,51.378 51.5,87.878
GND on Top Layer "TOP GND" (solid, remove dead copper, pour order 10): 52.136,87.777 52.636,87.277 135.886,87.277 135.886,44.527 135.386,44.027 135.136,43.777 46.636,43.777 46.636,82.277 52.386,88.027

## Keep-outs
Keep-Out Layer:
  rectangle: 76.113,63.068 117.893,63.5
  rectangle: 76.113,66.548 117.856,66.995
  rectangle: 129.482,59.613 130.186,66.548
  rectangle: 133.75,59.445 134.366,66.548
  lines w0.076: 55.874,56.499 55.931,57.094 56.1,57.666 56.375,58.197 56.745,58.665 57.198,59.054 57.717,59.351 58.282,59.543 58.874,59.624 58.874,70.374 58.282,70.456 57.717,70.648 57.198,70.944 56.745,71.333 56.375,71.802 56.1,72.332 55.931,72.905 55.874,73.499 55.926,74.066 56.08,74.615 56.331,75.126 56.67,75.584 57.087,75.972 57.567,76.278 58.095,76.492 58.653,76.607 59.223,76.619 59.785,76.527 60.321,76.334 60.813,76.048 61.246,75.677 61.604,75.234 61.875,74.733 62.051,74.191 62.126,73.627 72.877,73.627 72.953,74.188 73.129,74.727 73.4,75.225 73.756,75.665 74.186,76.034 74.676,76.319 75.209,76.511 75.768,76.603 76.335,76.593 76.89,76.48 77.416,76.269 77.895,75.966 78.311,75.581 78.651,75.127 78.903,74.62 79.059,74.075 79.114,73.511 79.109,73.51 79.105,73.509 79.102,73.507 79.099,73.504 79.097,73.5 79.095,73.496 79.095,73.492 79.095,73.487 79.097,73.483 79.099,73.48 79.102,73.477 79.105,73.475 79.109,73.473 79.114,73.473 79.054,72.882 78.883,72.314 78.608,71.788 78.238,71.324 77.787,70.939 77.271,70.645 76.709,70.455 76.121,70.374 76.121,67.298 76.117,67.298 76.113,67.296 76.109,67.294 76.106,67.291 76.104,67.288 76.103,67.284 76.102,67.279 76.103,67.275 76.104,67.271 76.106,67.268 76.109,67.265 76.112,67.263 76.116,67.261 76.12,67.26 76.124,67.26 76.128,67.261 76.132,67.263 76.135,67.266 76.388,67.013 76.385,67.009 76.383,67.004 76.382,66.999 76.383,66.995 76.384,66.991 76.386,66.988 76.389,66.985 76.392,66.983 76.395,66.981 76.399,66.98 76.403,66.98 76.407,66.981 76.411,66.983 76.414,66.985 76.417,66.988 76.419,66.991 76.42,66.995 76.42,66.999 117.925,66.999 117.925,69.567 115.493,71.999 100.993,71.999 99.493,73.499 99.493,79.999 99.556,80.556 99.741,81.084 100.038,81.558 100.434,81.954 100.908,82.252 101.437,82.437 101.993,82.499 109.493,82.499 110.434,81.558 123.552,81.558 124.493,82.499 131.993,82.499 132.549,82.437 133.078,82.252 133.552,81.954 133.948,81.558 134.245,81.084 134.43,80.556 134.493,79.999 134.493,77.629 134.181,77.317 128.966,77.317 128.407,77.262 127.871,77.099 127.376,76.834 126.942,76.479 126.866,76.402 126.466,75.881 126.215,75.275 126.129,74.624 126.129,59.714 126.165,59.445 126.269,59.194 126.434,58.978 126.793,58.702 127.212,58.529 127.661,58.47 127.885,58.47 128.312,58.526 128.709,58.691 129.05,58.953 129.285,59.258 129.432,59.613 129.482,59.995 129.482,73.723 129.5,73.858 129.552,73.983 129.635,74.091 129.796,74.215 129.984,74.293 130.186,74.32 134.207,74.32 134.493,74.033 134.493,49.999 134.43,49.443 134.245,48.914 133.948,48.44 133.552,48.045 133.078,47.747 132.549,47.562 131.993,47.499 124.493,47.499 123.552,48.44 110.434,48.44 109.493,47.499 101.993,47.499 101.437,47.562 100.908,47.747 100.434,48.045 100.038,48.44 99.741,48.914 99.556,49.443 99.493,49.999 99.493,56.499 100.993,57.999 115.575,57.999 117.9,60.324 117.9,62.999 76.398,62.999 76.397,63.003 76.396,63.007 76.394,63.01 76.392,63.013 76.388,63.016 76.385,63.017 76.381,63.018 76.377,63.018 76.373,63.017 76.369,63.016 76.366,63.013 76.363,63.01 76.361,63.007 76.36,63.003 76.36,62.999 76.36,62.994 76.362,62.99 76.365,62.986 76.135,62.756 76.132,62.758 76.128,62.76 76.124,62.761 76.12,62.761 76.116,62.76 76.113,62.759 76.109,62.757 76.107,62.754 76.104,62.75 76.103,62.746 76.103,62.742 76.103,62.738 76.105,62.734 76.107,62.73 76.11,62.727 76.114,62.725 76.118,62.724 76.122,62.723 76.122,59.624 76.71,59.543 77.272,59.353 77.788,59.06 78.239,58.674 78.609,58.21 78.884,57.684 79.055,57.116 79.115,56.525 79.111,56.525 79.107,56.523 79.103,56.521 79.1,56.518 79.098,56.514 79.096,56.51 79.096,56.506 79.096,56.502 79.098,56.498 79.1,56.494 79.103,56.491 79.107,56.489 79.111,56.488 79.115,56.487 79.06,55.923 78.904,55.378 78.651,54.871 78.312,54.417 77.895,54.032 77.416,53.729 76.891,53.518 76.335,53.405 75.768,53.394 75.209,53.487 74.676,53.678 74.186,53.964 73.756,54.333 73.4,54.773 73.129,55.271 72.953,55.81 72.877,56.372 62.126,56.372 62.051,55.807 61.875,55.265 61.604,54.765 61.246,54.321 60.813,53.95 60.321,53.664 59.785,53.472 59.223,53.38 58.653,53.391 58.095,53.506 57.567,53.72 57.087,54.026 56.67,54.415 56.331,54.872 56.08,55.383 55.926,55.932 55.874,56.499

## Other copper
Top Layer:
  pour cut-out: 62.611,69.342 64.897,69.342 64.897,67.056 62.611,67.056
  pour cut-out: 70.739,68.326 72.263,68.326 72.263,66.675 70.739,66.675
  pour cut-out: 61.722,63.246 64.262,63.246 64.262,60.706 61.722,60.706
  pour cut-out: 68.834,63.043 73.152,63.043 73.152,60.884 68.834,60.884
  text "REV D" at 117.323,72.389 h1.52
Mid-Layer 1:
  pour cut-out: 68.834,63.043 73.152,63.043 73.152,60.884 68.834,60.884
  pour cut-out: 61.722,63.246 64.262,63.246 64.262,60.706 61.722,60.706
  pour cut-out: 62.611,69.342 64.897,69.342 64.897,67.056 62.611,67.056
  pour cut-out: 70.739,68.326 72.263,68.326 72.263,66.675 70.739,66.675
Mid-Layer 2:
  pour cut-out: 68.834,63.043 73.152,63.043 73.152,60.884 68.834,60.884
  pour cut-out: 61.722,63.246 64.262,63.246 64.262,60.706 61.722,60.706
  pour cut-out: 62.611,69.342 64.897,69.342 64.897,67.056 62.611,67.056
  pour cut-out: 70.739,68.326 72.263,68.326 72.263,66.675 70.739,66.675
Bottom Layer:
  pour cut-out: 68.834,63.043 73.152,63.043 73.152,60.884 68.834,60.884
  pour cut-out: 61.722,63.246 64.262,63.246 64.262,60.706 61.722,60.706
  pour cut-out: 62.611,69.342 64.897,69.342 64.897,67.056 62.611,67.056
  pour cut-out: 70.739,68.326 72.263,68.326 72.263,66.675 70.739,66.675
  text "REV D" at 124.155,72.34 h1.52

## Silkscreen, mask and mechanical layers (free items; w line width, h text height)
Top Overlay:
  circle w0.254: c57.087,75.972 r1.316
  circle w0.254: c77.724,76.074 r1.18
  circle w0.254: c78.312,54.417 r1.446
  circle w0.254: c57.087,54.026 r1.215
  circle w0.254: c131.92,74.317 r0.518
  circle w0.254: c132.067,77.332 r0.527
  circle w0.254: c116.993,81.558 r0.935
  circle w0.254: c116.84,48.26 r0.848
  circle w0.254: c105.41,57.999 r2.01
  circle w0.254: c105.664,71.999 r1.912
  lines w0.01: 76.116,62.745 76.12,67.279 ; 117.87,62.999 117.87,66.999 ; 129.462,59.842 134.493,59.842 ; 129.482,66.294 134.493,66.294
  lines w0.254: 83,59.5 83,62.25 ; 83,67.75 83,70.5 ; 106.426,59.434 106.426,62.184 ; 106.426,67.684 106.426,70.434 ; 124.181,73.355 124.181,73.355
  text "MPU-6000   LSM303D   L3GD20  Hardware version 1.2" at 105.156,78.359 h0.8
  text "IMU Vibration Isolated" at 101.219,75.565 h0.8
Bottom Overlay:
  text "3.3v" at 70.688,70.104 h1.52
  text "GND" at 125.222,65 h0.8
  text "3v3" at 119.896,62.484 h0.8
  text "MPU" at 122.627,62.484 h0.8
  text "SCK" at 125.127,62.484 h0.8
  text "L3GD" at 120.105,59.728 h0.8
  text "MOSI" at 122.682,59.728 h0.8
  text "LSM" at 125.222,59.728 h0.8
  text "GND" at 62.992,59.436 h1.52
  text "T" at 74.727,59.353 h1.52
  text "TEMP" at 120.023,57 h0.8
  text "BARO" at 122.754,57 h0.8
  text "MISO" at 125.222,57 h0.8
Mechanical 1:
  drawing of 292 lines, arcs and shapes, not listed
Mechanical 16:
  drawing of 595 lines, arcs and shapes, not listed
  text "Layer" at 56.593,153.664 h1.52
  text "Name" at 63.193,153.664 h1.52
  text "Material" at 76.274,153.664 h1.52
  text "Thickness" at 92.24,153.664 h1.52
  text "Constant" at 101.86,153.664 h1.52
  text "Board Layer Stack" at 110.736,153.664 h1.52
  text "Flex" at 125.644,153.664 h1.52
  text "Change from Rev B to Rev C /  / added floating section for DF40 connector / New test point pattern to suit the factory /  / Added pins for temperature control /  / Change from Rev C to Rev D /  / Change thickness of PCB to suit mechanical needs. / Incorporated routing instructions 1.1mm +/-0.1mm" at 16.758,151.13 h1.52
  text "1" at 56.593,150.616 h1.52
  text "Top Overlay" at 63.193,150.616 h1.52
  text "2" at 56.593,147.568 h1.52
  text "Top Solder" at 63.193,147.568 h1.52
  text "BLACK Matte Finish" at 76.274,147.568 h1.52
  text "0.010mm" at 92.24,147.568 h1.52
  text "3.5" at 101.86,147.568 h1.52
  text "3" at 56.593,144.52 h1.52
  text "Top Layer" at 63.193,144.52 h1.52
  text "Copper" at 76.274,144.52 h1.52
  text "0.035mm" at 92.24,144.52 h1.52
  text "4" at 56.593,141.472 h1.52
  text "Dielectric 1" at 63.193,141.472 h1.52
  text "FR-4" at 76.274,141.472 h1.52
  text "0.474mm" at 92.24,141.472 h1.52
  text "4.2" at 101.86,141.472 h1.52
  text "5" at 56.593,138.424 h1.52
  text "Mid-Layer 1" at 63.193,138.424 h1.52
  text "Copper" at 76.274,138.424 h1.52
  text "0.018mm" at 92.24,138.424 h1.52
  text "6" at 56.593,135.376 h1.52
  text "Dielectric 2" at 63.193,135.376 h1.52
  text "Polyamide" at 76.274,135.376 h1.52
  text "0.025mm" at 92.24,135.376 h1.52
  text "3" at 101.86,135.376 h1.52
  text "7" at 56.593,132.328 h1.52
  text "Mid-Layer 2" at 63.193,132.328 h1.52
  text "Copper" at 76.274,132.328 h1.52
  text "0.018mm" at 92.24,132.328 h1.52
  text "8" at 56.593,129.28 h1.52
  text "Dielectric 3" at 63.193,129.28 h1.52
  text "FR-4" at 76.274,129.28 h1.52
  text "0.474mm" at 92.24,129.28 h1.52
  text "4.2" at 101.86,129.28 h1.52
  text "9" at 56.593,126.232 h1.52
  text "Bottom Layer" at 63.193,126.232 h1.52
  text "Copper" at 76.274,126.232 h1.52
  text "0.035mm" at 92.24,126.232 h1.52
  text "10" at 56.593,123.184 h1.52
  text "Bottom Solder" at 63.193,123.184 h1.52
  text "BLACK Matte Finish" at 76.274,123.184 h1.52
  text "0.010mm" at 92.24,123.184 h1.52
  text "3.5" at 101.86,123.184 h1.52
  text "11" at 56.593,120.136 h1.52
  text "Bottom Overlay" at 63.193,120.136 h1.52
  text "BLACK MATTE SOLDER MASK / 1.1mm thick / +/- 0.1mm" at 57.35,81.107 h1.52
  text "Tab in areas marked by Circle only" at 63.094,46.99 h1.52

## Text inside footprints (layer, text, board x,y; h text height)
U3: Top Overlay "X" at 63.406,61.1 h0.26 r180; Top Overlay "Y" at 62,62.61 h0.26 r180; Top Overlay "Z" at 61.9,60.9 h0.26 r180